# EAGLE board String_Thing_Pen_1.0 (EAGLE 6.1)
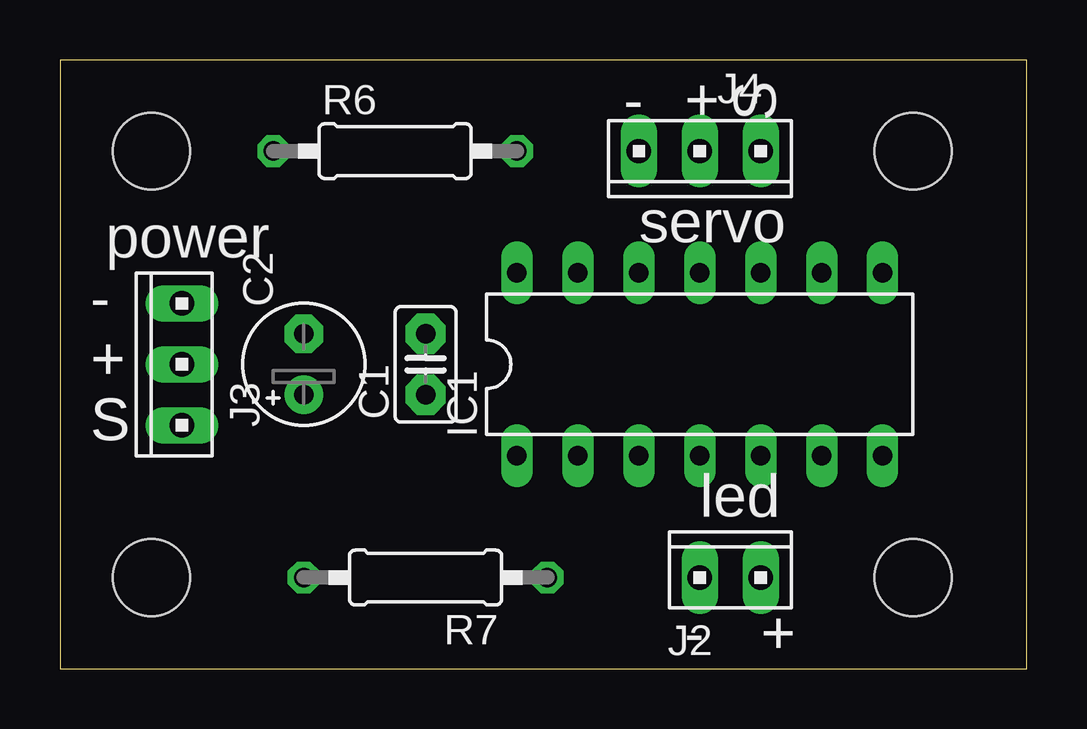
[diagram p0: board, top side]
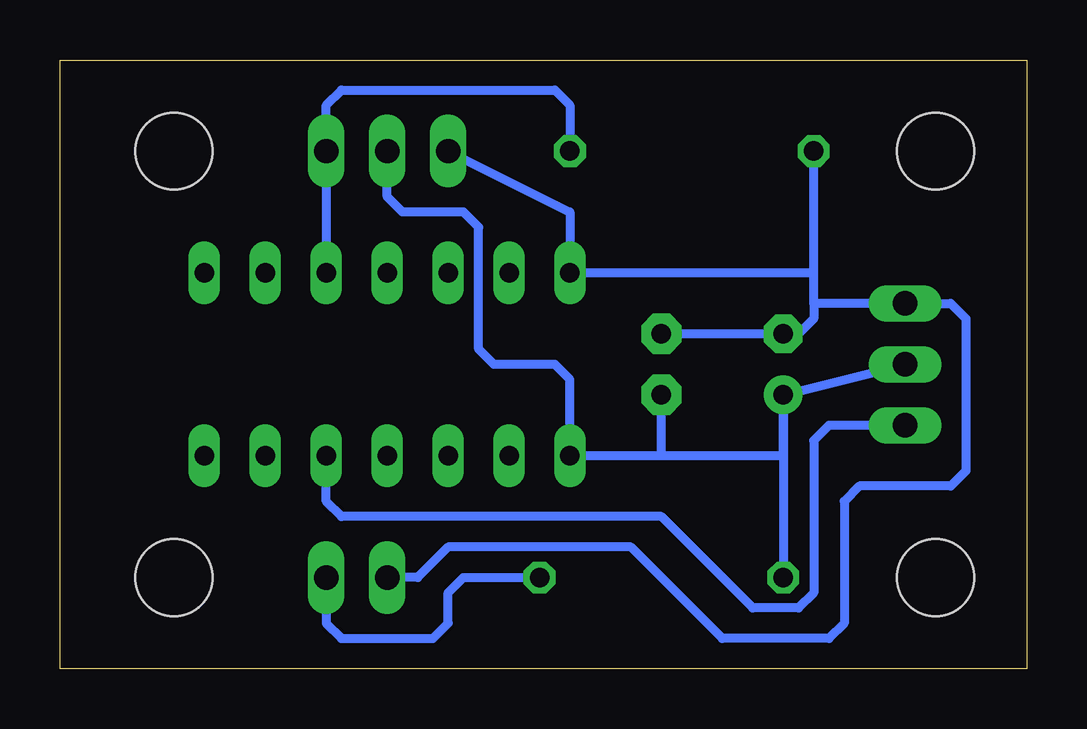
[diagram p1: board, bottom side, seen from below]

Size 40.31 x 25.39 mm. Coordinates in mm from the lower left corner, seen from the top.
Outline: 0,0 40.31,0 40.31,25.39 0,25.39 0,0
Copper layers (1*16): Top 0.035mm / dielectric 1.5mm / Bottom 0.035mm
Design rules: minimum track width 15mil, minimum drill 24mil, track to track 8mil, track to pad 8mil, pad to pad 8mil, via to via 8mil, smd to smd 8mil, copper to edge 40mil, drill to drill 8mil, minimum pad ring 10mil, minimum via ring 8mil, stop-mask expansion 4mil, vias tented up to drill 0mil, thermal gap 10mil
Holes 3.2 mm at 3.81,21.59 3.81,3.81 35.56,3.81 35.56,21.59

## Footprints (pad centres in the part's own frame; a part is rotated, then mirrored left to right if it is on the bottom)
C025-025X050 = drill 0.813 pad 1.676 octagon: 1 -1.27,0; 2 1.27,0
E2,5-5 = drill 0.813 pad 1.6: + -1.27,0 | drill 0.813 pad 1.6 octagon: - 1.27,0
DIL14 = drill 0.813 long: 1 -7.62,-3.81; 2 -5.08,-3.81; 3 -2.54,-3.81; 4 0,-3.81; 5 2.54,-3.81; 6 5.08,-3.81; 7 7.62,-3.81; 8 7.62,3.81; 9 5.08,3.81; 10 2.54,3.81; 11 0,3.81; 12 -2.54,3.81; 13 -5.08,3.81; 14 -7.62,3.81
10X02MTA = drill 1.016 long: 1 1.27,0; 2 -1.27,0
10X03MTA = drill 1.016 long: 1 2.54,0; 2 0,0; 3 -2.54,0
0207/10 = drill 0.813 octagon: 1 -5.08,0; 2 5.08,0

## Placement (x,y rotation side)
C1  [C025-025X050]  15.24,12.7 90 top
C2  [E2,5-5]  10.16,12.7 90 top
IC1  PIC16F676P  [DIL14]  26.67,12.7 0 top
J2  [10X02MTA]  27.94,3.81 0 top
J3  [10X03MTA]  5.08,12.7 90 top
J4  [10X03MTA]  26.67,21.59 180 top
R6  [0207/10]  13.97,21.59 0 top
R7  [0207/10]  15.24,3.81 180 top

## Library data of the parts
C1 C2 = adafruit
IC1 = microchip; MF: MICROCHIP; MPN: PIC16F676-I/P; OC_FARNELL: 9760512; OC_NEWARK: 54K2829
J2-J4 = con-amp
R6 R7 = resistor

## Nets
GND: C1.2 C2.- IC1.14 J2.2 J3.1 J4.1 R6.1
N$4: IC1.10 J4.3 R6.2
N$9: J2.1 R7.1
N$10: IC1.5 J3.3
VCC: C1.1 C2.+ IC1.1 J3.2 J4.2 R7.2

## Tracks (layer width: path | path; a pad name or v marks a point on that pad's centre or on a via)
GND
  Bottom 0.381: J4.1 19.05,19.05 IC1.14 8.89,16.51 | 8.89,15.24 8.89,16.51 | 8.89,16.51 R6.1 | C1.2 C2.- 9.53,13.97 8.89,14.61 8.89,15.24 | J2.2 25.4,3.81 24.13,5.08 16.51,5.08 12.7,1.27 8.26,1.27 7.62,1.91 7.62,6.99 6.99,7.62 3.17,7.62 2.54,8.26 2.54,14.61 3.17,15.24 J3.1 8.89,15.24
N$4
  Bottom 0.381: R6.2 19.05,23.5 19.68,24.13 28.57,24.13 29.21,23.5 J4.3 IC1.10
N$9
  Bottom 0.381: R7.1 23.5,3.81 24.13,3.17 24.13,1.91 24.77,1.27 28.57,1.27 29.21,1.91 J2.1
N$10
  Bottom 0.381: IC1.5 29.21,6.99 28.57,6.35 15.24,6.35 11.43,2.54 9.53,2.54 8.89,3.17 8.89,9.53 8.26,10.16 J3.3
VCC
  Bottom 0.381: C2.+ 10.16,8.89 15.24,8.89 | C2.+ R7.2 | 15.24,8.89 IC1.1 19.05,12.06 19.68,12.7 22.23,12.7 22.86,13.34 22.86,18.41 23.5,19.05 26.04,19.05 26.67,19.68 J4.2 | C2.+ J3.2 | 15.24,8.89 C1.1

## Text on the board
tPlace: - | + | S | servo | power | - | + | S | led | - | +